# Altium PCB TAUV-Powerboard.PcbDoc (part 1 of 2)
Units mil, origin at the board's own origin, x right, y up, seen from the top; angles counter-clockwise.
Board outline 4160 x 2875 mil, 4 copper layers (Component Side, Ground Plane, Power Plane, Solder Side), stack 33.234 mil thick; 127 components, 71 nets, 369 pads, 185 vias.
Unrouted connection lines stored in the file: 125.
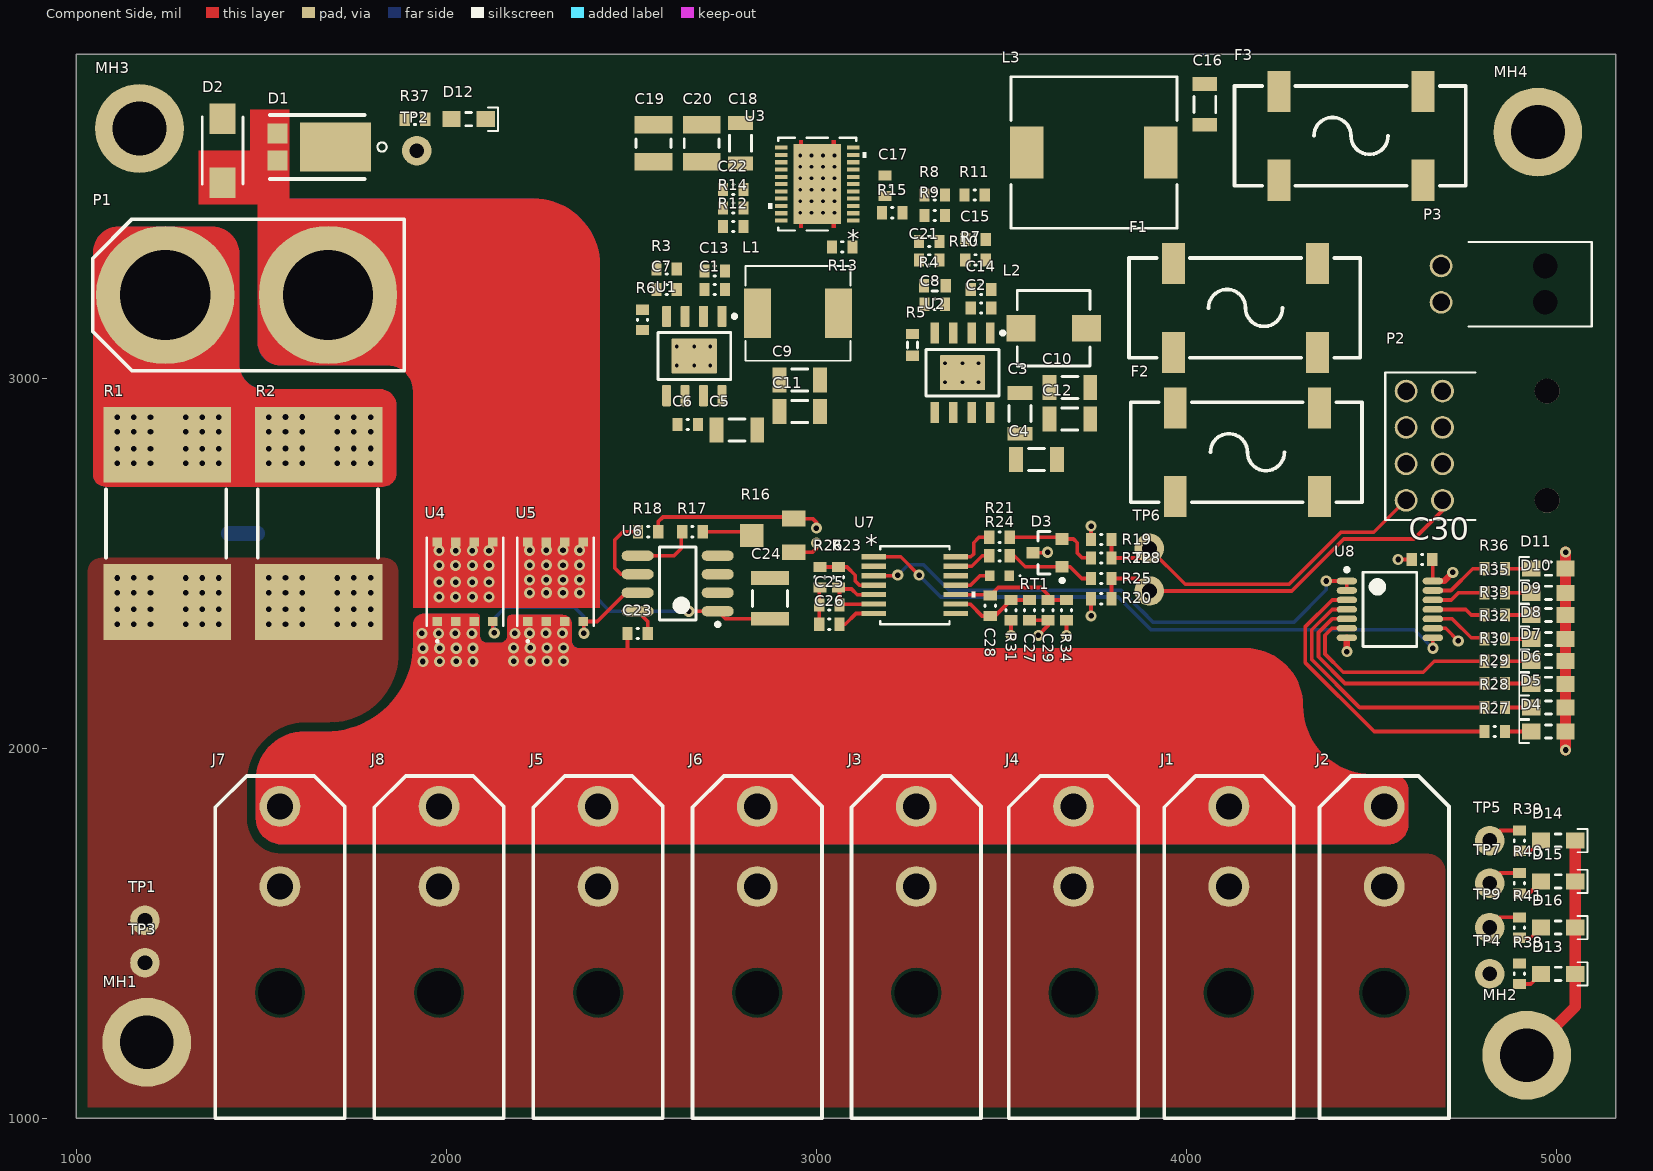
[diagram p0: Component Side view]
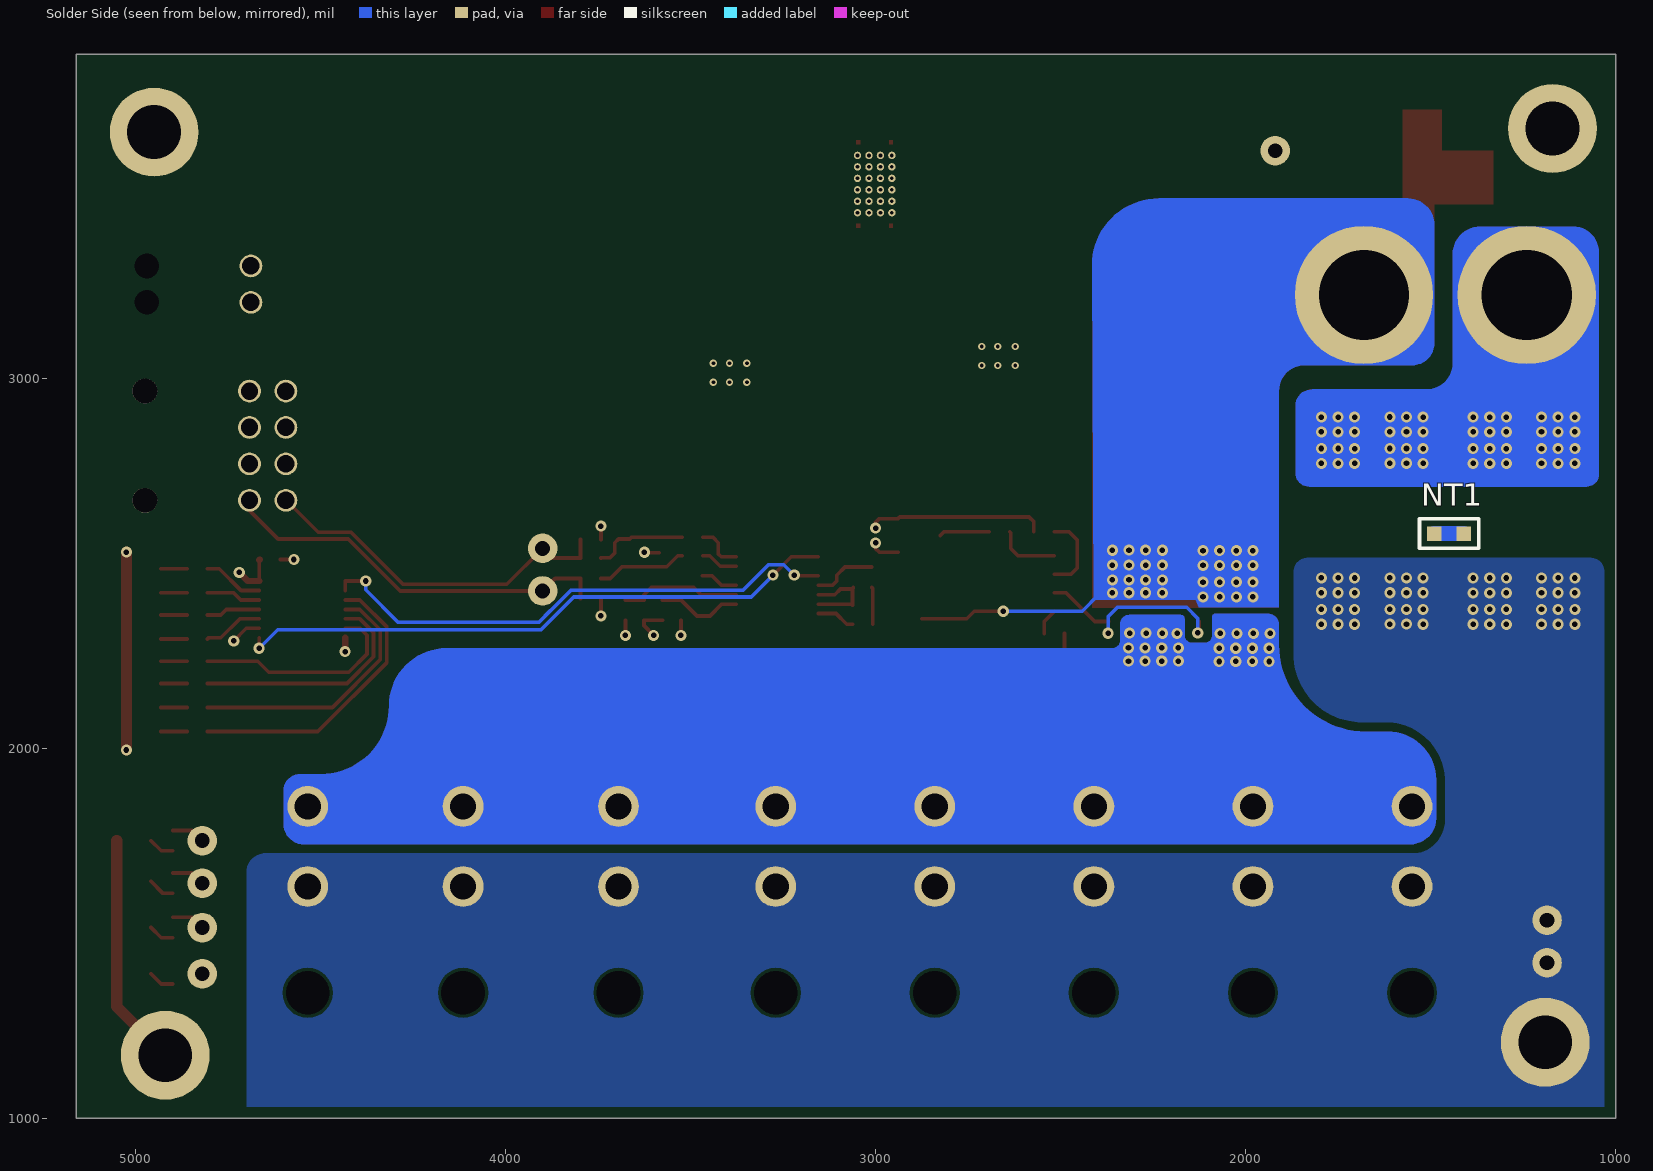
[diagram p1: Solder Side view, seen from below]
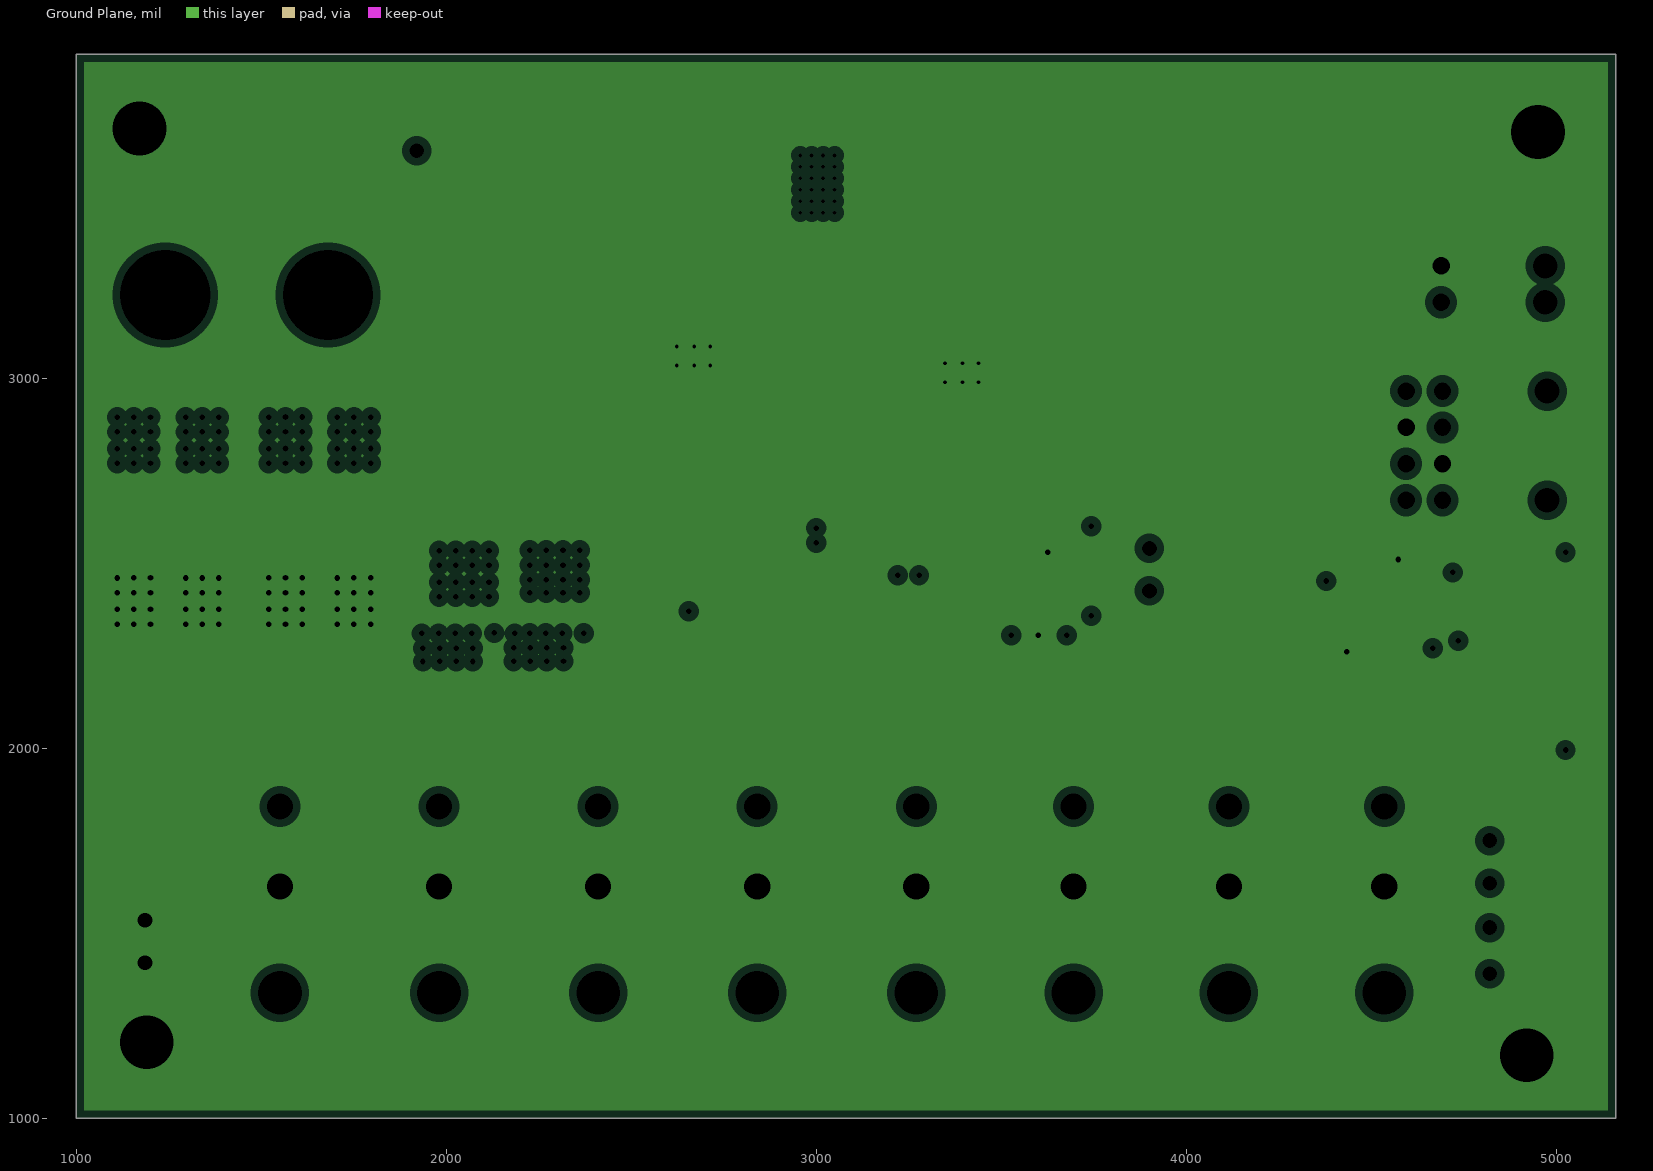
[diagram p2: Ground Plane, clearances drawn from the general rule]
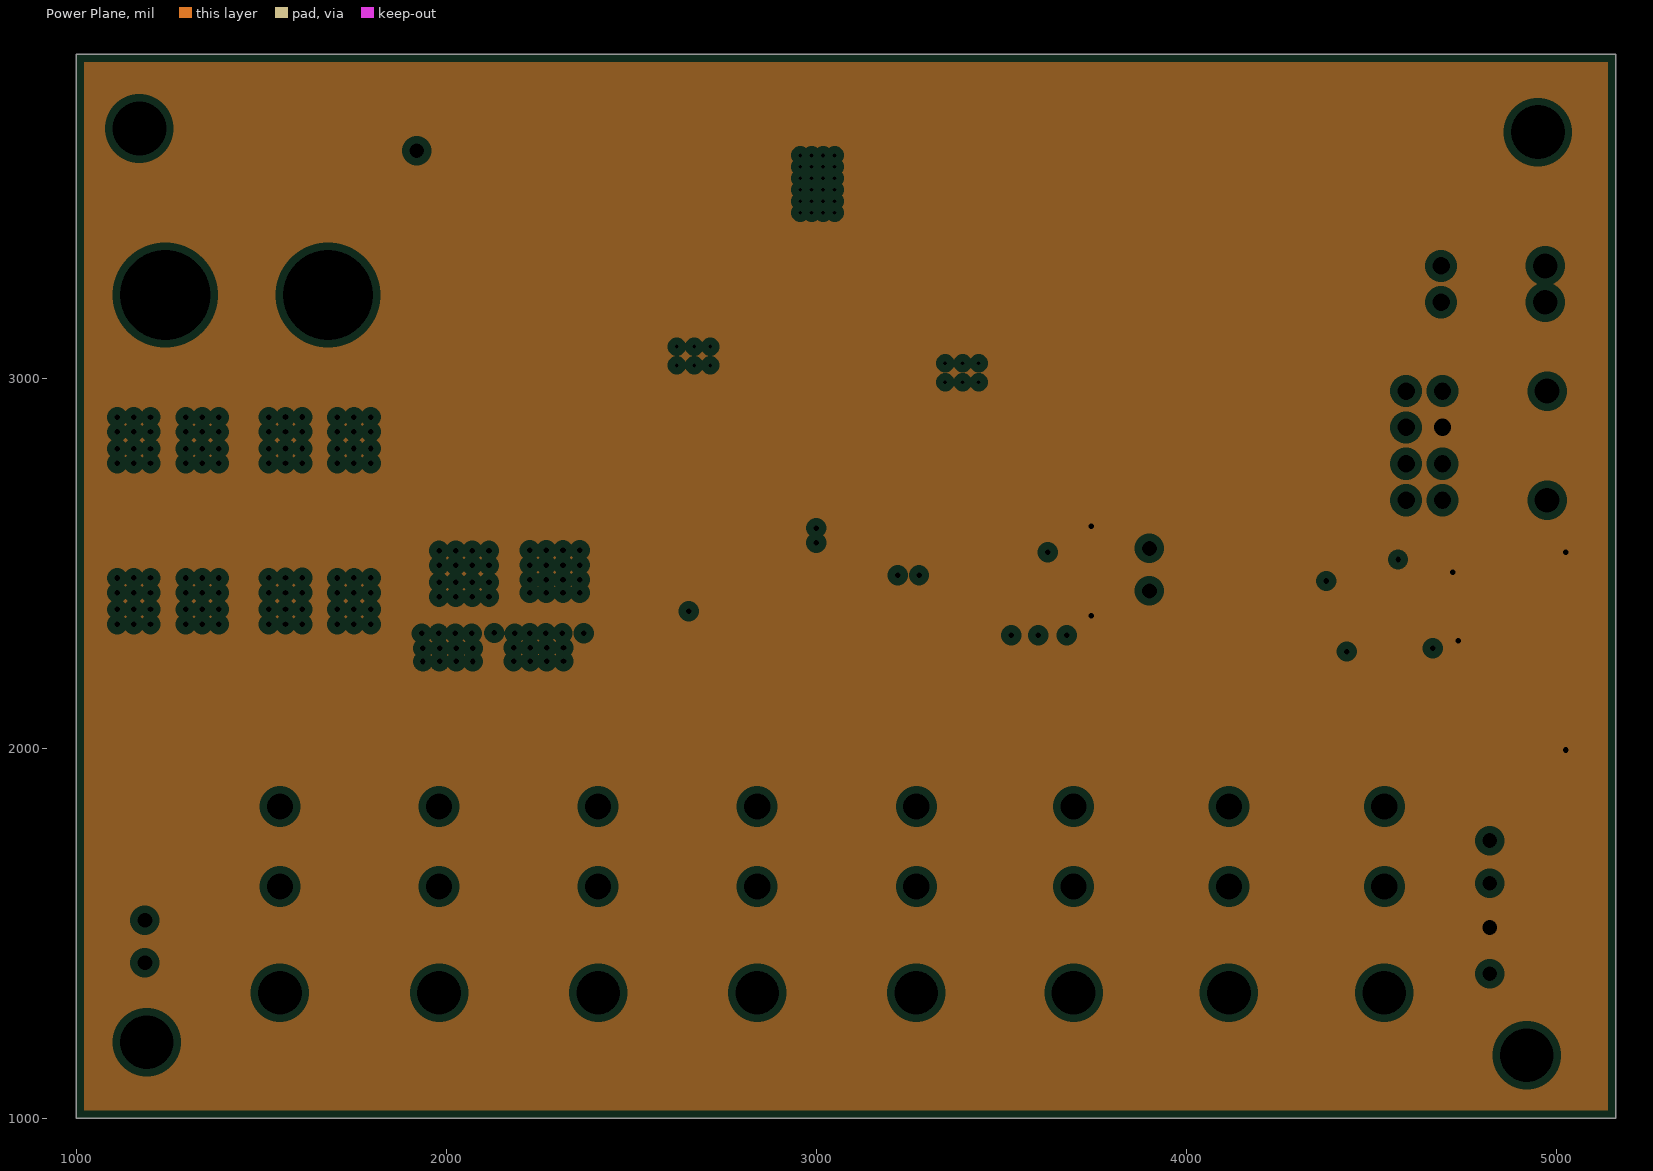
[diagram p3: Power Plane, clearances drawn from the general rule]

## Layer stack, top to bottom
Top Solder: solder mask 0.4, Solder Resist, Dk 3.5
Component Side: signal copper 1.4
Dielectric 1: core 12.6, FR-4, Dk 4.8
Ground Plane: plane copper 1.417, net GND
Dielectric 3: prepreg 5, Dk 4.2
Power Plane: plane copper 1.417, net VCC_3V3
Dielectric 4: core 10, Dk 4.2
Solder Side: signal copper 1.4
Bottom Solder: solder mask 0.4, Solder Resist, Dk 3.5

## Board outline
1000,1000 5160,1000 5160,3875 1000,3875

## Design rules (kind name [scope] priority, off if disabled: settings)
Clearance [All] p1: gap=8 ignorepadtopadclearanceinfootprint=FALSE except(7: SMDPad-SMDPad)
PlaneClearance [All] p1: clearance=20
PlaneConnect [All] p1: planeconnectstyle=Relief reliefexpansion=20 reliefentries=4 reliefconductorwidth=10 reliefairgap=10
PolygonConnect PolygonConnect_1 [InNet('GND')] p1: connectstyle=Direct reliefconductorwidth=50 reliefentries=4 polygonreliefangle="90 Angle" airgapwidth=10
PolygonConnect [All] p2: connectstyle=Relief reliefconductorwidth=10 reliefentries=4 polygonreliefangle="90 Angle" airgapwidth=10
RoutingVias [All] p1: holewidth=15 width=30 viastyle="Through Hole" minholewidth=15 minwidth=30 maxholewidth=28 maxwidth=50
SolderMaskExpansion [All] p1: expansion=4
Width [All] p1: maxlimit=30 minlimit=10 preferedwidth=10
28 further rules are at their usual default settings.

## Classes and differential pairs
component class U_Thrusters: *1 *2 *3 *4 *5 *6 *7 *8 C23 C24 J1 J2 J3 J4 J5 J6 J7 J8 R16 R17 R18 U4 U5 U6
component class U_Regulators: C1 C2 C3 C4 C5 C6 C7 C8 C9 C10 C11 C12 C13 C14 C15 C16 C17 C18 C19 C20 C21 C22 F1 F2 F3 L1 L2 L3 R3 R4 R5 R6 R7 R8 R9 R10 R11 R12 R13 R14 R15 U1 U2 U3
component class U_Power: D1 D2 NT1 P1 R1 R2
component class U_Interface: D12 D13 D14 D15 D16 MH1 MH2 MH3 MH4 P2 P3 R37 R38 R39 R40 R41 TP1 TP2 TP3 TP4 TP5 TP6 TP7 TP8 TP9
component class U_BMS: C25 C26 C27 C28 C29 C30 D3 D4 D5 D6 D7 D8 D9 D10 D11 R19 R20 R21 R22 R23 R24 R25 R26 R27 R28 R29 R30 R31 R32 R33 R34 R35 R36 RT1 U7 U8

## Components (designator, comment, footprint, x,y, rotation, side; value= is the part's Value field where it differs from the comment)
C1 "680nF" CAPC0603(1608)100_L 2725,3240 r180 top
C2 "100nF" CAPC0603(1608)100_L 3445,3190 r180 top
C3 "4.7uF" CAPC1206(3216)190_L 3550,2904.88 r270 top
C4 "4.7uF" CAPC1206(3216)190_L 3595,2780 r180 top
C5 "10uF" CAPC1206(3216)190_L 2785,2860 r180 top
C6 "100nF" CAPC0603(1608)100_L 2652.44,2875 r0 top
C7 "12pF" CAPC0603(1608)100_L 2595,3240 r180 top
C8 "75pF" CAPC0603(1608)100_L 3320,3200 r180 top
C9 "4.7uF" CAPC1206(3216)190_L 2955,2995 r0 top
C10 "4.7uF" CAPC1206(3216)190_L 3685,2975 r0 top
C11 "47uF" CAPC1206(3216)190_L 2955,2910 r0 top
C12 "47uF" CAPC1206(3216)190_L 3684.88,2890 r0 top
C13 "1uF" CAPC0603(1608)100_L 2725,3290 r180 top
C14 "1uF" CAPC0603(1608)100_L 3445,3240 r180 top
C15 "100nF" CAPC0603(1608)100_L 3430,3375 r0 top
C16 "100uF" CAPC1206(3216)190_L 4050,3740 r270 top
C17 "100nF" CAPC0603(1608)100_L 3185,3520 r270 top
C18 "4.7uF" CAPC1206(3216)190_L 2795,3635.12 r270 top
C19 "22uF" CAPC1210(3225)220_L 2560,3635 r270 top
C20 "22uF" CAPC1210(3225)220_L 2690,3635 r270 top
C21 "1nF" CAPC0603(1608)100_L 3305,3320 r0 top
C22 "1uF" CAPC0603(1608)100_L 2775,3510 r0 top
C23 "10nF" CAPC0603(1608)100_L 2516.73,2310 r180 top
C24 "22uF" CAPC1210(3225)100_L 2875,2405 r90 top
C25 "1uF 25V" CAPC0603(1608)100_L 3035,2386.97 r0 top value=1uF
C26 "1uF 25V" CAPC0603(1608)100_L 3035,2335 r0 top value=1uF
C27 "100nF 25V" CAPC0603(1608)100_L 3576.22,2373.03 r270 top value=100nF
C28 "100nF 25V" CAPC0603(1608)100_L 3470,2385 r270 top value=100nF
C29 "100nF 25V" CAPC0603(1608)100_L 3626.22,2373.03 r270 top value=100nF
C30 "100nF 25V" CAPC0603(1608)100_L 4637.02,2510 r0 top value=100nF
D1 "SBRT15U50SP5-13" SBRT15U50SP5-13 1700,3625 r270 top
D2 "SMAJ30CA" LFUS-DO-214AC-A-2_V 1395,3615 r90 top
D3 "MMBZ5V6ALT1G" ONSC-SOT-23-3-318-08_V 3625,2528 r180 top
D4 "LED RED" LED_0805 4978.74,2045 r0 top
D5 "LED RED" LED_0805 4978.74,2110 r0 top
D6 "LED YELLOW" LED_0805 4978.74,2174.02 r0 top
D7 "LED YELLOW" LED_0805 4978.74,2235 r0 top
D8 "LED YELLOW" LED_0805 4978.74,2295 r0 top
D9 "LED GREEN" LED_0805 4978.74,2360 r0 top
D10 "LED GREEN" LED_0805 4978.74,2420 r0 top
D11 "LED GREEN" LED_0805 4978.74,2485 r0 top
D12 "LED GREEN" LED_0805 2060,3700 r180 top
D13 "LED GREEN" LED_0805 5005,1390 r180 top
D14 "LED GREEN" LED_0805 5005,1750 r180 top
D15 "LED GREEN" LED_0805 5005,1640 r180 top
D16 "LED GREEN" LED_0805 5005,1515 r180 top
F1 "Fuse Holder 3588" "Fuse Holder 3588" 4160,3190 r0 top
F2 "Fuse Holder 3588" "Fuse Holder 3588" 4165,2800 r0 top
F3 "Fuse Holder 3588" "Fuse Holder 3588" 4445,3655 r0 top
J1 "2-pin megafit RA" "2-pin Megafit RA" 4115,1000 r0 top
J2 "2-pin megafit RA" "2-pin Megafit RA" 4535,1000 r0 top
J3 "2-pin megafit RA" "2-pin Megafit RA" 3270,1000 r0 top
J4 "2-pin megafit RA" "2-pin Megafit RA" 3695,1000 r0 top
J5 "2-pin megafit RA" "2-pin Megafit RA" 2410,1000 r0 top
J6 "2-pin megafit RA" "2-pin Megafit RA" 2840,1000 r0 top
J7 "2-pin megafit RA" "2-pin Megafit RA" 1550,1000 r0 top
J8 "2-pin megafit RA" "2-pin Megafit RA" 1980,1000 r0 top
L1 "SRP6540-100M" IND_SRP6540-100M 2950,3175 r0 top
L2 "6.8uH" "BOURNS SRP5030T" 3641.42,3135 r0 top
L3 "7443330220" WE-HCC-1090 3750,3610 r0 top
MH1 "#4-40" "Mounting Hole #4-40" 1190,1205 r0 top
MH2 "#4-40" "Mounting Hole #4-40" 4920,1170 r0 top
MH3 "#4-40" "Mounting Hole #4-40" 1170,3675 r0 top
MH4 "#4-40" "Mounting Hole #4-40" 4950,3665 r0 top
NT1 "Net Tie" Net_Tie_80mil 1410,2580 r0 bottom net-tie
P1 "XT90" XT90 1240,3225 r0 top
P2 "8-Pin 4x2 Molex Nano-Fit" "MOLEX NANO-FIT 2x4" 4593.9,2965.28 r270 top
P3 "2-Pos Molex Nano-Fit" "MOLEX NANO-FIT 1X2" 4688.5,3205 r90 top value=Value
R1 "WSLP59312 2mR 8W" WSLP59312L000FEA 1245,2820 r270 top
R2 "WSLP59312 2mR 8W" WSLP59312L000FEA 1655,2820 r270 top
R3 "200K 1%" RESC0603(1608)_L 2595,3295 r180 top value="200000.00 Ohm"
R4 "Res3" J1-0603 3320,3250 r180 top value=51K
R5 "Res3" J1-0603 3260,3090 r90 top value=22K1
R6 "22K1 1%" RESC0603(1608)_L 2530,3157.44 r90 top value="22100.00 Ohm"
R7 "1K65 1%" RESC0603(1608)_L 3430,3320 r180 top value="1650.00 Ohm"
R8 "560K" RESC0603(1608)_L 3320,3495 r180 top value="560000.00 Ohm"
R9 "976R" RESC0603(1608)_L 3320,3440 r180 top value="976.00 Ohm"
R10 "69K8" RESC0603(1608)_L 3305,3370 r0 top value="69800.00 Ohm"
R11 "86K6" RESC0603(1608)_L 3427.56,3495 r180 top value="86600.00 Ohm"
R12 "162K" RESC0603(1608)_L 2775,3410 r0 top value="162000.00 Ohm"
R13 "10K" RESC0603(1608)_L 3070,3355 r0 top value="10000.00 Ohm"
R14 "105K" RESC0603(1608)_L 2775,3460 r0 top value="105000.00 Ohm"
R15 "105K" RESC0603(1608)_L 3205,3447.18 r180 top value="105000.00 Ohm"
R16 "22AR100KLFTR" "TT BI 22A TRIM POT" 2939.17,2575 r90 top value=100k
R17 "1K 1% 0603(1608)" RESC0603(1608)_L 2665,2585 r0 top value="1000.00 Ohm"
R18 "330R 1% 0603(1608)" RESC0603(1608)_L 2545,2585 r0 top value="330.00 Ohm"
R19 "4K7" RESC0603(1608)_L 3770,2563.78 r180 top value="4700.00 Ohm"
R20 "4K7" RESC0603(1608)_L 3770,2403.78 r180 top value="4700.00 Ohm"
R21 "100R" RESC0603(1608)_L 3495,2570 r0 top value="100.00 Ohm"
R22 "100R" RESC0603(1608)_L 3770,2513.78 r0 top value="100.00 Ohm"
R23 "294K" RESC0603(1608)_L 3060,2461.97 r270 top value="294000.00 Ohm"
R24 "100R" RESC0603(1608)_L 3495,2520 r0 top value="100.00 Ohm"
R25 "100R" RESC0603(1608)_L 3770,2458.78 r0 top value="100.00 Ohm"
R26 "16K5" RESC0603(1608)_L 3010,2461.97 r90 top value="16500.00 Ohm"
R27 "100R" RESC0603(1608)_L 4833.74,2045 r0 top value="100.00 Ohm"
R28 "100R" RESC0603(1608)_L 4833.74,2110 r0 top value="100.00 Ohm"
R29 "100R" RESC0603(1608)_L 4833.74,2175 r0 top value="100.00 Ohm"
R30 "100R" RESC0603(1608)_L 4833.74,2235 r0 top value="100.00 Ohm"
R31 "100R 1%" RESC0603(1608)_L 3526.22,2373.03 r90 top value="100.00 Ohm"
R32 "100R" RESC0603(1608)_L 4833.74,2295 r0 top value="100.00 Ohm"
R33 "100R" RESC0603(1608)_L 4833.74,2360 r0 top value="100.00 Ohm"
R34 "100R 1%" RESC0603(1608)_L 3676.22,2373.03 r90 top value="100.00 Ohm"
R35 "100R" RESC0603(1608)_L 4833.74,2420 r0 top value="100.00 Ohm"
R36 "100R" RESC0603(1608)_L 4833.74,2485 r0 top value="100.00 Ohm"
R37 "1K2" RESC0603(1608)_L 1915,3700 r180 top value="1200.00 Ohm"
R38 "1K2" RESC0603(1608)_L 4900,1390 r90 top value="1200.00 Ohm"
R39 "470R" RESC0603(1608)_L 4900,1750 r90 top value="470.00 Ohm"
R40 "220R" RESC0603(1608)_L 4900,1635 r90 top value="220.00 Ohm"
R41 "100R" RESC0603(1608)_L 4900,1515 r90 top value="100.00 Ohm"
RT1 "NCP18XH103F03RB" MURA-NCP18XH103F03RB-2_V 3495,2466.09 r180 top
TP1 "Test Point Loop" "Test Point Loop - Black" 1185,1535 r90 top
TP2 "Test Point Loop" "Test Point Loop - Black" 1920,3615 r0 top
TP3 "Test Point Loop" "Test Point Loop - Black" 1185,1420 r90 top
TP4 "Test Point Loop" "Test Point Loop - Black" 4820,1390 r0 top
TP5 "Test Point Loop" "Test Point Loop - Black" 4820,1750 r0 top
TP6 "Test Point Loop" "Test Point Loop - Black" 3900,2540 r0 top
TP7 "Test Point Loop" "Test Point Loop - Black" 4820,1635 r0 top
TP8 "Test Point Loop" "Test Point Loop - Black" 3900,2425 r0 top
TP9 "Test Point Loop" "Test Point Loop - Black" 4820,1515 r0 top
U1 "LMR23630-Q1" DDA0008E_N 2670,3060 r270 top
U2 "LMR23630-Q1" DDA0008E_N 3395,3015 r270 top
U3 "Part Number: TPS53319DQPT" DQP22_3P24X5P547 3002.44,3524.68 r180 top value=Value
U4 "Part Number: CSD18563Q5A" DQJ8 2050,2450 r90 top value=Value
U5 "Part Number: CSD18563Q5A" DQJ8 2295,2450 r90 top value=Value
U6 "MIC5021YM" MICL-SOICN-8LD-PL-1_V 2625,2445 r180 top
U7 "BQ34Z100PWR-G1" PW14 3266,2440.5 r0 top value=Value
U8 "SN74HC164PW" PW0014A_N 4550,2375 r0 top

## Footprints (in the part's own frame and the unit in brackets; to place one, negate y for a bottom-side part, rotate by r counter-clockwise, add the part's x,y. Pads: shape width x height; smd on the part's side, far side on the other; paste and mask are expansions set on the pad)
"2-pin Megafit RA" [mm]
  round 2.8 hole 1.8: 1(0,15.9) 2(0,21.4)
  round 0 hole 3 unplated: ""(0,8.6)
  silkscreen extent -4.44,0 4.44,23.49, body extent -4.16,-24.98 4.19,21.9, height 16.75
"BOURNS SRP5030T" [mm] "Precision Wire Wound Inductor, 2-Leads, Body 5.70x5.20mm, IPC Medium Density"
  rect 2x1.8 smd: 1(-2.25,0) 2(2.25,0)
  silkscreen extent -2.5,-2.6 2.5,2.6, body extent -2.85,-2.6 2.85,2.6, height 3
CAPC0603(1608)100_L [mm] "Chip Capacitor, Body 1.6x0.8mm, Height 1.0mm, IPC High Density"
  rect 0.7x0.9 smd: 1(-0.7,0) 2(0.7,0)
  silkscreen extent -0.05,-0.35 0.05,0.35, body extent -0.87,-0.47 0.88,0.48, height 1
CAPC1206(3216)190_L [mm] "Chip Capacitor, Body 3.2x1.6mm, Height 1.9mm, IPC High Density"
  rect 0.95x1.7 smd: 1(-1.4,0) 2(1.4,0)
  silkscreen extent -0.55,-0.75 0.55,0.75, body extent -1.7,-0.9 1.7,0.9, height 1.9
CAPC1210(3225)100_L [mm] "Chip Capacitor, Body 3.2x2.5mm, Height 1mm, IPC High Density"
  rect 0.95x2.6 smd: 1(-1.4,0) 2(1.4,0)
  silkscreen extent -0.55,-1.2 0.55,1.2, body extent -1.7,-1.35 1.7,1.35, height 1
CAPC1210(3225)220_L [mm] "Chip Capacitor, Body 3.2x2.5mm, Height 2.2mm, IPC High Density"
  rect 1.2x2.6 smd: 1(-1.275,0) 2(1.275,0)
  silkscreen extent -0.3,-1.2 0.3,1.2, body extent -1.7,-1.35 1.7,1.35, height 2.2
DDA0008E_N [mm] "SOP, 8-Leads, Body 4x5mm, Pitch 1.27mm, Thermal Pad 2.4x3.1mm, IPC Medium Density"
  rrect17% 1.45x0.6 smd: 1(-2.725,1.905) 2(-2.725,0.635) 3(-2.725,-0.635) 4(-2.725,-1.905) 5(2.725,-1.905) 6(2.725,-0.635) 7(2.725,0.635) 8(2.725,1.905)
  rrect4% 2.4x3.1 smd: 9(0,0)
  silkscreen extent -2.85,-2.5 1.6,2.88, body extent -2.98,-2.45 2.98,2.45, height 1.5
DQJ8 [mm]
  rect 0.63x0.65 smd paste-0.1: 1(-2.735,1.905) 2(-2.735,0.635) 3(-2.735,-0.635) 4(-2.735,-1.905) 5(2.735,-1.905) 6(2.735,-0.635) 7(2.735,0.635) 8(2.735,1.905)
  Component Side region: 2.745,0 2.745,2.23 -1.545,2.23 -1.545,0
  Component Side region: 2.745,0 2.745,-2.23 -1.545,-2.23 -1.545,0
  silkscreen extent -4.17,-2.63 3.03,2.63, body extent -2.9,-2.5 2.9,2.5, height 2.06
DQP22_3P24X5P547 [mil]
  rect 33.46x11.02 smd paste-16.73: 1(-97.44,98.43) 2(-97.44,78.74) 3(-97.44,59.06) 4(-97.44,39.37) 5(-97.44,19.68) 6(-97.44,0) 7(-97.44,-19.68) 8(-97.44,-39.37) 9(-97.44,-59.06) 10(-97.44,-78.74) 11(-97.44,-98.43) 12(97.44,-98.43) 13(97.44,-78.74) 14(97.44,-59.06) 15(97.44,-39.37) 16(97.44,-19.68) 17(97.44,0) 18(97.44,19.68) 19(97.44,39.37) 20(97.44,59.06) 21(97.44,78.74) 22(97.44,98.43)
  rect 127.56x215.71 smd paste-107.85 mask-107.5: 23(0,0)
  round 20 hole 10: V(-46.5,46.5) V(-46.5,77.5) V(-46.5,-15.5) V(-46.5,15.5) V(-46.5,-77.5) V(-46.5,-46.5) V(-15.5,77.5) V(-15.5,46.5) V(-15.5,15.5) V(-15.5,-15.5) V(-15.5,-46.5) V(-15.5,-77.5) V(15.5,77.5) V(15.5,46.5) V(15.5,15.5) V(15.5,-15.5) V(15.5,-46.5) V(15.5,-77.5) V(46.5,46.5) V(46.5,77.5) V(46.5,-15.5) V(46.5,15.5) V(46.5,-77.5) V(46.5,-46.5)
  Component Side region: 49.21,-107.85 39.37,-107.85 39.37,-118.09 49.21,-118.09
  Component Side region: -49.21,-107.85 -39.37,-107.85 -39.37,-118.09 -49.21,-118.09
  Component Side region: -49.21,107.85 -39.37,107.85 -39.37,118.09 -49.21,118.09
  Component Side region: 49.21,107.85 39.37,107.85 39.37,118.09 49.21,118.09
  Component Side region: 0,-107.85 0,-107.85 0,-107.85 0,-107.85 0,-107.85 0,-107.85 0,-107.85 0,-107.85
  Component Side region: 0,107.85 0,107.85 0,107.85 0,107.85 0,107.85 0,107.85 0,107.85 0,107.85
  silkscreen extent -132,-125 132,125, body extent -100,-120 200,120, height 81
"Fuse Holder 3588" [mil] "Keystone Electronics 3588 Automotive Blade Fuse Holder, SMT"
  rect 62x111 smd: 1(-195,-120) 1(-195,120) 2(195,-120) 2(195,120)
  silkscreen extent -315,-135 310,135, body extent -316,-173 314,172, height 686
IND_SRP6540-100M [mm]
  rect 1.85x3.4 smd: 1(-2.775,0) 2(2.775,0)
  silkscreen extent -3.6,-3.25 3.6,3.25, body extent -3.59,-3.25 3.59,3.25, height 3.97
J1-0603 [mm] "Chip Resistor, Body 1.6x0.8mm, IPC High Density"
  rect 0.7x0.9 smd: 1(-0.75,0) 2(0.75,0)
  silkscreen extent -0.2,-0.35 0.2,0.35, body extent -0.85,-0.48 0.85,0.48, height 0.9
LED_0805 [mm] "Liteon 0805 Chip LED"
  rect 1.25x1.1 smd: 1(-1.175,0) 2(1.175,0)
  silkscreen extent -2.01,-0.8 0.2,0.8, body extent -1,-0.63 1,0.63, height 0.8
LFUS-DO-214AC-A-2_V [mm] "Molded Diode, 2-Leads, Body 4.6x2.79mm"
  rect 2.1x1.8 smd: 1(-2.2,0) 2(2.2,0)
  silkscreen extent -2.3,-1.4 2.3,1.4, body extent -2.52,-1.4 2.52,1.4, height 2.29
MICL-SOICN-8LD-PL-1_V [mm] "SOIC, 8-Leads, Body 5x4mm, Pitch 1.27mm"
  oval 2.2x0.7 smd: 1(-2.75,1.905) 2(-2.75,0.635) 3(-2.75,-0.635) 4(-2.75,-1.905) 5(2.75,-1.905) 6(2.75,-0.635) 7(2.75,0.635) 8(2.75,1.905)
  silkscreen extent -2.88,-2.5 1.25,2.93, body extent -3.01,-2.44 3.01,2.45, height 1.73
"MOLEX NANO-FIT 1X2" [mm]
  round 1.56 hole 1.2: 1(0,0) 2(2.5,0)
  round 0 hole 1.7 unplated: ""(0,-7.15) ""(2.5,-7.15)
  silkscreen extent -1.65,-10.35 4.15,-1.9, body extent -2.67,-25.85 5.03,0.33, height 7.46
"MOLEX NANO-FIT 2x4" [mm] "MOLEX NANO-FIT 2X4"
  round 1.56 hole 1.2: 1(0,0) 2(2.5,0) 3(5,0) 4(7.5,0) 5(0,2.5) 6(2.5,2.5) 7(5,2.5) 8(7.5,2.5)
  round 1.7 hole 1.7: ""(0,9.68) ""(7.5,9.68)
  silkscreen extent -1.28,-1.43 8.85,4.77, body extent -2.6,-0.44 10.1,29.85, height 10.71
"Mounting Hole #4-40" [mm] "Mounting Hole for ANSI #4-40 w/ Flat Washer, Loose Fit"
  round 6.1 hole 3.7: 0(0,0)
MURA-NCP18XH103F03RB-2_V [mm] "Chip, 2-Leads, Body 1.6x0.8mm"
  rect 0.65x0.7 smd: 1(-0.675,0) 2(0.675,0)
  silkscreen extent -1.45,-0.05 -1.35,0.05, body extent -0.8,-0.4 0.8,0.4, height 0.8
Net_Tie_80mil [mm]
  rect 1x1 smd: 1(0,0) 2(2.032,0)
  Component Side lines w1.016: 0,0 2.032,0
  silkscreen extent -1.02,-1.02 3.05,1.02
ONSC-SOT-23-3-318-08_V [mm] "SOT23, 3-Leads, Body 2.92x1.3mm, Pitch 0.95mm"
  rect 0.9x0.8 smd: 1(-1,0.95) 2(-1,-0.95) 3(1,0)
  silkscreen extent -1.13,-1.46 0.65,2.02, body extent -0.65,-1.46 0.65,1.46, height 1.11
PW14 [mil]
  rect 66x14 smd paste+0 mask+0: 1(-111,76.77) 2(-111,51.18) 3(-111,25.59) 4(-111,0) 5(-111,-25.59) 6(-111,-51.18) 7(-111,-76.77) 8(111,-76.77) 9(111,-51.18) 10(111,-25.59) 11(111,0) 12(111,25.59) 13(111,51.18) 14(111,76.77)
  silkscreen extent -94,-106 164,106, body extent -130,-101 130,101, height 47
PW0014A_N [mm] "SOP, 14-Leads, Body 5.1x4.5mm, Pitch 0.65mm, IPC Medium Density"
  oval 1.4x0.45 smd: 1(-2.95,1.95) 2(-2.95,1.3) 3(-2.95,0.65) 4(-2.95,0) 5(-2.95,-0.65) 6(-2.95,-1.3) 7(-2.95,-1.95) 8(2.95,-1.95) 9(2.95,-1.3) 10(2.95,-0.65) 11(2.95,0) 12(2.95,0.65) 13(2.95,1.3) 14(2.95,1.95)
  silkscreen extent -3.07,-2.55 1.85,2.85, body extent -3.21,-2.5 3.21,2.5, height 1
RESC0603(1608)_L [mm] "Chip Resistor, Body 1.6x0.8mm, IPC High Density"
  rect 0.7x0.9 smd: 1(-0.7,0) 2(0.7,0)
  silkscreen extent -0.05,-0.35 0.05,0.35, body extent -0.85,-0.47 0.85,0.47, height 0.6
SBRT15U50SP5-13 [mm]
  rect 1.39x1.4 smd: 1(-0.92,-3.982) 1(0.92,-3.982)
  rect 3.36x4.86 smd: 2(0,0)
  silkscreen extent -2.2,-4.5 2.2,3.52, body extent -2,-4.6 2,2.4, height 1.05
"Test Point Loop - Black" [mil] ", black"
  round 80 hole 40: 1(0,0)
  body extent -50,-50 50,50, height 180
"TT BI 22A TRIM POT" [mm] "Model 22A (22AR100KLFTR)"
  rect 1.09x1.6 smd: 1(1.155,0) 3(-1.155,0)
  rect 1.6x1.6 smd: 2(0,2.9)
  body extent -1.6,-0.38 1.6,3.13, height 2.22
WE-HCC-1090 [mm] "Inductor, 2-Leads, Body 10.9 x 10.0 mm"
  rect 2.3x3.6 smd: 1(-4.6,0) 2(4.6,0)
  silkscreen extent -5.7,-5.2 5.7,5.2, body extent -5.13,-5 5.13,5, height 9.29
WSLP59312L000FEA [mm] "0.002R 8W Shunt"
  rect 5.2x8.75 smd: 1(0,0) 2(10.8,0)
  silkscreen extent 3.05,-4.19 7.75,4.06, body extent -2.17,-3.94 12.83,3.81, height 0.89
XT90 [mm]
  round 9.5 hole 6.2 unplated: 1(0,0) 2(11.176,0)
  silkscreen extent -4.99,-5.21 16.41,5.21, body extent -4.99,-5.5 16.41,5.5, height 20.7

## Part data
C1: library part CMP-1035-02724-1, "CAP 680nF 50V ±10% 0603 (1608 Metric) Thickness 1mm SMD", Case-EIA=0603, Case-Metric=1608, Rated Voltage="50 V", Tolerance=±10%, Max Thickness="1 mm", Technology=SMT
C2: library part CMP-1035-02595-1, "CAP 100nF 100V ±10% 0603 (1608 Metric) Thickness 1mm SMD", Case-EIA=0603, Case-Metric=1608, Rated Voltage="100 V", Tolerance=±10%, Max Thickness="1 mm", Technology=SMT
C3 C4 C9 C10 C18: library part CMP-1037-04922-1, "CAP 4.7uF 35V ±10% 1206 (3216 Metric) Thickness 1.9mm SMD", Case-EIA=1206, Case-Metric=3216, Rated Voltage="35 V", Tolerance=±10%, Max Thickness="1.9 mm", Technology=SMT
  C9 C10: Supplier 1=Digi-Key
C5: library part CMP-1037-04982-1, "CAP 10uF 50V ±10% 1206 (3216 Metric) Thickness 1.9mm SMD", Case-EIA=1206, Case-Metric=3216, Rated Voltage="50 V", Tolerance=±10%, Max Thickness="1.9 mm", Technology=SMT
C6 C15 C17: library part CMP-1035-02580-1, "CAP 100nF 10V ±10% 0603 (1608 Metric) Thickness 1mm SMD", Case-EIA=0603, Case-Metric=1608, Rated Voltage="10 V", Tolerance=±10%, Max Thickness="1 mm", Technology=SMT
C7: library part CMP-1035-00615-1, "CAP 12pF 50V ±0.25pF 0603 (1608 Metric) Thickness 1mm SMD", Case-EIA=0603, Case-Metric=1608, Rated Voltage="50 V", Tolerance=±0.25pF, Max Thickness="1 mm", Technology=SMT
C8: library part CMP-1035-01189-1, "CAP 75pF 25V ±1% 0603 (1608 Metric) Thickness 1mm SMD", Case-EIA=0603, Case-Metric=1608, Rated Voltage="25 V", Tolerance=±1%, Max Thickness="1 mm", Technology=SMT
C11 C12: library part CMP-1037-05003-1, "CAP 47uF 16V ±20% 1206 (3216 Metric) Thickness 1.9mm SMD", Case-EIA=1206, Case-Metric=3216, Rated Voltage="16 V", Tolerance=±20%, Max Thickness="1.9 mm", Technology=SMT
C13 C14: library part CMP-1035-02743-1, "CAP 1uF 35V ±10% 0603 (1608 Metric) Thickness 1mm SMD", Case-EIA=0603, Case-Metric=1608, Rated Voltage="35 V", Tolerance=±10%, Max Thickness="1 mm", Technology=SMT
C16: library part CMP-1037-05006-1, "CAP 100uF 10V ±20% 1206 (3216 Metric) Thickness 1.9mm SMD", Case-EIA=1206, Case-Metric=3216, Rated Voltage="10 V", Tolerance=±20%, Max Thickness="1.9 mm", Technology=SMT
C19 C20: library part CMP-1038-02286-1, "CAP 22uF 25V -20% to +80% 1210 (3225 Metric) Thickness 2.2mm SMD", Case-EIA=1210, Case-Metric=3225, Rated Voltage="25 V", Tolerance="-20% to +80%", Max Thickness="2.2 mm", Technology=SMT
C21: library part CMP-1035-01885-1, "CAP 1nF 25V ±20% 0603 (1608 Metric) Thickness 1mm SMD", Case-EIA=0603, Case-Metric=1608, Rated Voltage="25 V", Tolerance=±20%, Max Thickness="1 mm", Technology=SMT
C22: library part CMP-1035-02745-1, "CAP 1uF 50V ±10% 0603 (1608 Metric) Thickness 1mm SMD", Case-EIA=0603, Case-Metric=1608, Rated Voltage="50 V", Tolerance=±10%, Max Thickness="1 mm", Technology=SMT
C23: library part CMP-1035-02315-1, "CAP 10nF 25V ±2% 0603 (1608 Metric) Thickness 1mm SMD", Case-EIA=0603, Case-Metric=1608, Rated Voltage="25 V", Tolerance=±2%, Max Thickness="1 mm", Technology=SMT
C24: library part CMP-1038-01290-1, "CAP 22nF 16V ±5% 1210 (3225 Metric) Thickness 1mm SMD", Case-EIA=1210, Case-Metric=3225, Rated Voltage="16 V", Tolerance=±20%, Max Thickness="1 mm", Technology=SMT
C25 C26: library part CMP-1035-02740-1, "CAP 1uF 25V ±10% 0603 (1608 Metric) Thickness 1mm SMD", Case-EIA=0603, Case-Metric=1608, Rated Voltage="25 V", Tolerance=±10%, Max Thickness="1 mm", Technology=SMT
C27 C28 C29 C30: library part CMP-1035-02588-1, "CAP 100nF 25V ±10% 0603 (1608 Metric) Thickness 1mm SMD", Case-EIA=0603, Case-Metric=1608, Rated Voltage="25 V", Tolerance=±10%, Max Thickness="1 mm", Technology=SMT
D1: Capacitance @ Vr, F=-, Current - Average Rectified (Io)=15A, Manufacturer="Diodes Incorporated", Operating Temperature - Junction="-65°C ~ 150°C", Package / Case="PowerDI™ 5", Supplier Device Package=PowerDI®5, Supplier Part Number 1=SBRT15U50SP5-13DICT-ND, Category="Discrete Semiconductor Products", ComponentLink1Description=https://media.digikey.com/pdf/Data%20Sheets/Diodes%20PDFs/SBRT15U50SP5.pdf, ComponentLink1URL=https://media.digikey.com/pdf/Data%20Sheets/Diodes%20PDFs/SBRT15U50SP5.pdf, Diode Type="Super Barrier", Manufacturer Part Number=SBRT15U50SP5-13, Mounting Type="Surface Mount", Packaging="Cut Tape (CT)", Part Status=Active, Pricing 1="1=0.93, 10=0.823, 100=0.6306, 500=0.49852, 1000=0.39882 (USD)", RoHS="RoHS Compliant", Speed="Fast Recovery =< 500ns, > 200mA (Io)", Stock 1=12134, Supplier 1=Digi-Key
D2: library part CMP-2000-07088-1, "Transient Voltage Suppression Diode, 30 V, -65 to 150 degC, 2-Pin SMD, RoHS, Tape and Reel", Capacitance @ Frequency=-, Current - Peak Pulse (10/1000µs)=8.3A, Manufacturer=Littelfuse-Inc., Operating Temperature=-55°C~150°C(TJ), Package / Case=DO-214AC,SMA, Package Description="2-Pin Surface Mount Device, Body 4.295 x 2.595 mm", Package Reference=DO-214AC, Power - Peak Pulse=400W, Power Line Protection=No, Supplier Device Package=DO-214AC(SMA), Voltage - Breakdown (Min)=33.3V, Voltage - Clamping (Max) @ Ipp=48.4V, Voltage - Reverse Standoff (Typ)=30V, Applications=GeneralPurpose, Bidirectional Channels=1, Category=CircuitProtection, Datasheet URL=http://www.littelfuse.com/~/media/electronics/datasheets/tvs_diodes/littelfuse_tvs_diode_smaj_datasheet.pdf.pdf, Datasheet Version=11/2015, Family=TVS-Diodes, Manufacturer URL=http://www.littelfuse.com/, Mounting Technology=SurfaceMount, Mounting Type=SurfaceMount, Packaging=Digi-Reel®, Series=SMAJ, Type=Zener, Unidirectional Channels=-
D3: library part CMP-1060-01222-1, "24 W Peak Power Zener Transient Voltage Suppressor, Dual Common Anode Zeners for ESD Protection, 3-Pin SOT-23, Pb-Free, Tape and Reel", Manufacturer="On Semiconductor", ComponentLink1Description="Manufacturer URL", ComponentLink1URL=http://www.onsemi.com/, ComponentLink2Description=Datasheet, ComponentLink2URL=http://www.onsemi.cn/pub_link/Collateral/MMBZ5V6ALT1-D.PDF, ComponentLink3Description="Package Specification", ComponentLink3URL=http://www.onsemi.cn/pub_link/Collateral/318-08.PDF, DatasheetVersion="Rev. 13", Mounting Technology="Surface Mount", PackageDescription="3-Pin Small Outline Transistor, Body 2.92 x 1.3 mm, Pitch 0.95 mm", PackageReference=SOT-23-3-318-08, PackageVersion="Rev. AP, 11/2009", Packing="Tape and Reel", PartNumber=MMBZ5V6ALT1G, RoHS=Pb-Free, VZ Typ (V)=5.6
D4 D5: library part LED0, "led /  LTST-C171KRKT", Color=Red, Current - Test=20mA, Lens Color=Colorless, Manufacturer="Lite-On Inc.", Manufacturer Part Number=LTST-C171KRKT, Millicandela Rating=54mcd, Package / Case="0805 (2012 Metric)", Supplier Part Number 1=160-1427-1-ND, Voltage - Forward (Vf) (Typ)=2V, Category=Optoelectronics, ComponentLink1Description=http://optoelectronics.liteon.com/upload/download/DS22-2000-109/LTST-C171KRKT.pdf, ComponentLink1URL=http://optoelectronics.liteon.com/upload/download/DS22-2000-109/LTST-C171KRKT.pdf, Features=-, Height (Max)=0.80mm, Lens Style/Size="Rectangle with Flat Top, 1.40mm x 1.25mm", Lens Transparency=Clear, Mounting Type="Surface Mount", Packaging="Cut Tape (CT)", Part Status=Active, Pricing 1="1=0.31, 10=0.225, 25=0.1656, 100=0.1183, 250=0.0804, 500=0.07096, 1000=0.05558 (USD)", RoHS="RoHS Compliant", Size / Dimension="2.00mm L x 1.25mm W", Stock 1=260544, Supplier 1=Digi-Key, Viewing Angle=130°, Wavelength - Dominant=631nm, Wavelength - Peak=639nm
D6 D7 D8: library part LED0, "led /  LTST-C171KSKT", Color=Green, Current - Test=20mA, Lens Color=Colorless, Manufacturer="Lite-On Inc.", Manufacturer Part Number=LTST-C171KGKT, Millicandela Rating=35mcd, Package / Case="0805 (2012 Metric)", Supplier Part Number 1=160-1426-1-ND, Voltage - Forward (Vf) (Typ)=2V, Category=Optoelectronics, ComponentLink1Description=http://optoelectronics.liteon.com/upload/download/DS22-2000-110/LTST-C171KSKT.pdf, ComponentLink1URL=http://optoelectronics.liteon.com/upload/download/DS22-2000-110/LTST-C171KSKT.pdf, Features=-, Height (Max)=0.90mm, Lens Style/Size="Rectangle with Flat Top, 1.40mm x 1.25mm", Lens Transparency=Clear, Mounting Type="Surface Mount", Packaging="Cut Tape (CT)", Part Status=Active, Pricing 1="1=0.31, 10=0.225, 25=0.1656, 100=0.1183, 250=0.0804, 500=0.07096, 1000=0.05558 (USD)", RoHS="RoHS Compliant", Size / Dimension="2.00mm L x 1.25mm W", Stock 1=350441, Supplier 1=Digi-Key, Viewing Angle=130°, Wavelength - Dominant=571nm, Wavelength - Peak=574nm
D9 D10 D11: library part LED0, "led /  LTST-C171KRKT", Color=Green, Current - Test=20mA, Lens Color=Colorless, Manufacturer="Lite-On Inc.", Manufacturer Part Number=LTST-C171KGKT, Millicandela Rating=35mcd, Package / Case="0805 (2012 Metric)", Supplier Part Number 1=160-1426-1-ND, Voltage - Forward (Vf) (Typ)=2V, Category=Optoelectronics, ComponentLink1Description=http://optoelectronics.liteon.com/upload/download/DS22-2000-118/LTST-C171KGKT.pdf, ComponentLink1URL=http://optoelectronics.liteon.com/upload/download/DS22-2000-118/LTST-C171KGKT.pdf, Features=-, Height (Max)=0.90mm, Lens Style/Size="Rectangle with Flat Top, 1.40mm x 1.25mm", Lens Transparency=Clear, Mounting Type="Surface Mount", Packaging="Cut Tape (CT)", Part Status=Active, Pricing 1="1=0.31, 10=0.225, 25=0.1656, 100=0.1183, 250=0.0804, 500=0.07096, 1000=0.05558 (USD)", RoHS="RoHS Compliant", Size / Dimension="2.00mm L x 1.25mm W", Stock 1=350441, Supplier 1=Digi-Key, Viewing Angle=130°, Wavelength - Dominant=571nm, Wavelength - Peak=574nm
D12 D13 D14 D15 D16: library part LED0, "led", Color=Green, Current - Test=20mA, Lens Color=Colorless, Manufacturer="Lite-On Inc.", Manufacturer Part Number=LTST-C171KGKT, Millicandela Rating=35mcd, Package / Case="0805 (2012 Metric)", Supplier Part Number 1=160-1426-1-ND, Voltage - Forward (Vf) (Typ)=2V, Category=Optoelectronics, ComponentLink1Description=http://optoelectronics.liteon.com/upload/download/DS22-2000-118/LTST-C171KGKT.pdf, ComponentLink1URL=http://optoelectronics.liteon.com/upload/download/DS22-2000-118/LTST-C171KGKT.pdf, Features=-, Height (Max)=0.90mm, Lens Style/Size="Rectangle with Flat Top, 1.40mm x 1.25mm", Lens Transparency=Clear, Mounting Type="Surface Mount", Packaging="Cut Tape (CT)", Part Status=Active, Pricing 1="1=0.31, 10=0.225, 25=0.1656, 100=0.1183, 250=0.0804, 500=0.07096, 1000=0.05558 (USD)", RoHS="RoHS Compliant", Size / Dimension="2.00mm L x 1.25mm W", Stock 1=350441, Supplier 1=Digi-Key, Viewing Angle=130°, Wavelength - Dominant=571nm, Wavelength - Peak=574nm
F1 F2 F3: library part "3588 Fuse Holder", "Keystone Electronics 3588", Supplier Part Number 1=36-3588-ND, Datasheet=http://keyelco.com/userAssets/file/M65p43.pdf, Supplier 1=Digi-Key
L1: "Inductor Power Shielded/Molded Wirewound 10uH 20% 100KHz Powdered Iron 4A 78.5mOhm DCR T/R", Package="Nonstandard Bourns", Digi-Key_Part_Number=SRP6540-100MCT-ND, Digi-Key_Purchase_URL=https://www.digikey.com/product-detail/en/bourns-inc/SRP6540-100M/SRP6540-100MCT-ND/3986041?utm_source=snapeda&utm_medium=aggregator&utm_campaign=symbol, MF=Bourns, MP=SRP6540-100M, SnapEDA_Link=https://www.snapeda.com/parts/SRP6540-100M/Bourns/view-part/?ref=snap
L2: library part SRP5030TA, DC Resistance (DCR)="76.2 mOhm Max", Manufacturer="Bourns Inc.", Manufacturer Part Number=SRP5030TA-6R8M, Operating Temperature="-40°C ~ 150°C", Package / Case=Nonstandard, Q @ Freq="15 @ 100kHz", Ratings=AEC-Q200, Supplier Device Package=-, Supplier Part Number 1=SRP5030TA-6R8MCT-ND, Tolerance=±20%, Category="Inductors, Coils, Chokes", ComponentLink1Description=http://www.bourns.com/docs/Product-Datasheets/SRP5030TA.pdf, ComponentLink1URL=http://www.bourns.com/docs/Product-Datasheets/SRP5030TA.pdf, Height - Seated (Max)="0.118\" (3.00mm)", Material - Core="Carbonyl Powder", Mounting Type="Surface Mount", Packaging="Cut Tape (CT)", Part Status=Active, Pricing 1="1=1.51, 10=1.397, 100=0.9781, 500=0.79178, 1000=0.72191 (USD)", RoHS="RoHS Compliant", Shielding=Shielded, Size / Dimension="0.224\" L x 0.205\" W (5.70mm x 5.20mm)", Stock 1=5626, Supplier 1=Digi-Key, Type=Wirewound
L3: library part CMP-0226-00110-1, "SMD High Current Cube Inductor WE-HCC, L=2.20 µH", Inductance="2.20 µH", ComponentLink1Description="Manufacturer Link", ComponentLink1URL=http://www.we-online.com, ComponentLink2Description=Datasheet, ComponentLink2URL=http://www.we-online.de/katalog/media/pdf/7443330220.pdf, DatasheetVersion="ver 2, Nov-2009", PackageDescription="Inductor, 2-Leads, Body 10.9 x 10.0 mm", PackageReference=WE-HCC-1090, PackageVersion=2009
MH1 MH2 MH3 MH4: library part "Mounting Hole #4-40, Loose Fit", "Mounting Hole for ANSI #4-40 w/ Flat Washer, Loose Fit", Datasheet=http://blogs.mentor.com/tom-hausherr/blog/tag/pcb-mounting-holes/
NT1: "Use to tie together nets"
P2: library part "8-Pin 2-Row Nano-Fit", "NanoFit RA Hdr TH DR 8Ckt", Manufacturer=Molex, Part Number=105314-1216, Supplier Part Number=WM15165-ND, Supplier Part Number 1=WM15168-ND, Supplier=Digi-Key, Supplier 1=Digi-Key
P3: Supplier Part Number 1=WM14972-ND, RefDes=RefDes, Supplier 1=Digi-Key, Type=Type
R1 R2: library part WSLP59312L000FEA
R3: library part CMP-1012-00768-1, "200K 0.1W 1% 0603 (1608 Metric)  SMD", Case-EIA=0603, Case-Metric=1608, Power="0.1 W", Tolerance="1 %", Technology=SMT
R4 R5: "Resistor", LatestRevisionDate=29-May-2009, LatestRevisionNote="IPC-7351 Footprint Added.", PackageDescription="Chip Resistor", PackageReference=J1-0603, Published=8-Jun-2000, Publisher="Altium Limited"
R6: library part CMP-1012-00660-1, "22K1 0.1W 1% 0603 (1608 Metric)  SMD", Case-EIA=0603, Case-Metric=1608, Power="0.1 W", Tolerance="1 %", Technology=SMT
R7: library part CMP-1012-00533-1, "1K65 0.1W 1% 0603 (1608 Metric)  SMD", Case-EIA=0603, Case-Metric=1608, Power="0.1 W", Tolerance="1 %", Technology=SMT
R8: library part CMP-1012-00821-1, "560K 0.1W 1% 0603 (1608 Metric)  SMD", Case-EIA=0603, Case-Metric=1608, Power="0.1 W", Tolerance="1 %", Technology=SMT
R9: library part CMP-1012-00509-1, "976R 0.1W 1% 0603 (1608 Metric)  SMD", Case-EIA=0603, Case-Metric=1608, Power="0.1 W", Tolerance="1 %", Technology=SMT
R10: library part CMP-1012-00719-1, "69K8 0.1W 1% 0603 (1608 Metric)  SMD", Case-EIA=0603, Case-Metric=1608, Power="0.1 W", Tolerance="1 %", Technology=SMT
R11: library part CMP-1012-00729-1, "86K6 0.1W 1% 0603 (1608 Metric)  SMD", Case-EIA=0603, Case-Metric=1608, Power="0.1 W", Tolerance="1 %", Technology=SMT
R12: library part CMP-1012-00758-1, "162K 0.1W 1% 0603 (1608 Metric)  SMD", Case-EIA=0603, Case-Metric=1608, Power="0.1 W", Tolerance="1 %", Technology=SMT
R13: library part CMP-1012-00623-1, "10K 0.1W 1% 0603 (1608 Metric)  SMD", Case-EIA=0603, Case-Metric=1608, Power="0.1 W", Tolerance="1 %", Technology=SMT
R14 R15: library part CMP-1012-00738-1, "105K 0.1W 1% 0603 (1608 Metric)  SMD", Case-EIA=0603, Case-Metric=1608, Power="0.1 W", Tolerance="1 %", Technology=SMT
R16: library part "TT 22AR Trim Pot", "TT Electronics BI 22AR100KLFTR SMT trim pot, 100k 20%", Supplier Part Number 1=987-1003-1-ND, Tolerance=20%, Datasheet=http://www.bitechnologies.com/pdfs/22.pdf, Supplier 1=Digi-Key
R17: library part CMP-1012-00510-1, "1K 0.1W 1% 0603 (1608 Metric)  SMD", Case-EIA=0603, Case-Metric=1608, Power="0.1 W", Tolerance="1 %", Technology=SMT
R18: library part CMP-1012-00454-1, "330R 0.1W 1% 0603 (1608 Metric)  SMD", Case-EIA=0603, Case-Metric=1608, Power="0.1 W", Tolerance="1 %", Technology=SMT
R19 R20: library part CMP-1012-00586-1, "4K7 0.1W 1% 0603 (1608 Metric)  SMD", Case-EIA=0603, Case-Metric=1608, Power="0.1 W", Tolerance="1 %", Technology=SMT
R21 R22 R24 R25 R31 R34: library part CMP-1012-00397-1, "100R 0.1W 1% 0603 (1608 Metric)  SMD", Case-EIA=0603, Case-Metric=1608, Power="0.1 W", Tolerance="1 %", Technology=SMT
R23: library part CMP-1012-00787-1, "294K 0.1W 1% 0603 (1608 Metric)  SMD", Case-EIA=0603, Case-Metric=1608, Power="0.1 W", Tolerance="1 %", Technology=SMT
R26: library part CMP-1012-00646-1, "16K5 0.1W 1% 0603 (1608 Metric)  SMD", Case-EIA=0603, Case-Metric=1608, Power="0.1 W", Tolerance="1 %", Technology=SMT
R27 R28 R29 R30 R32 R33 R35 R36 R41: library part CMP-1012-00050-1, "100R 0.1W 5% 0603 (1608 Metric)  SMD", Case-EIA=0603, Case-Metric=1608, Power="0.1 W", Tolerance="5 %", Technology=SMT
R37 R38: library part CMP-1012-00518-1, "1K2 0.1W 1% 0603 (1608 Metric)  SMD", Case-EIA=0603, Case-Metric=1608, Power="0.1 W", Tolerance="1 %", Technology=SMT
R39: library part CMP-1012-00473-1, "470R 0.1W 1% 0603 (1608 Metric)  SMD", Case-EIA=0603, Case-Metric=1608, Power="0.1 W", Tolerance="1 %", Technology=SMT
R40: library part CMP-1012-00058-1, "220R 0.1W 5% 0603 (1608 Metric)  SMD", Case-EIA=0603, Case-Metric=1608, Power="0.1 W", Tolerance="5 %", Technology=SMT
RT1: library part CMP-2000-05271-1, "NTC Thermistor, 10 KOhm, +/- 1%, 0.1 W, -40 to 125 degC, 0603 (1608 Metric), RoHS, Tape and Reel", Manufacturer=Murata, Rated Current=310A, Resistance=10kO, Temperature Range=-40to+125degC, Tolerance (%)=±1%, B-constant=3434K, Datasheet URL=http://www.jameco.com/Jameco/Products/ProdDS/1870999.pdf, Datasheet Version=Apr-05, Manufacturer URL=http://www.murata.com/, Type=NTC
TP1 TP2 TP3 TP4 TP5 TP6 TP7 TP8 TP9: "Keyston Electronics 5001 Test Point Loop", Color=Black, Manufacturer="Keystone Electronics", Manufacturer P/N=5001, Supplier Part Number 1=36-5001-ND, Supplier 1=Digi-Key
U1 U2: Current - Output=3A, Frequency - Switching=400kHz, Manufacturer="Texas Instruments", Manufacturer Part Number=LMR23630AFQDDARQ1, Operating Temperature="-40°C ~ 125°C (TJ)", Package / Case="8-SOIC (0.154\", 3.90mm Width) Exposed Pad", Supplier Device Package="8-SO PowerPad", Supplier Part Number 1=296-45260-6-ND, Voltage - Input (Max)=36V, Voltage - Input (Min)=4.5V, Voltage - Output (Max)=28V, Voltage - Output (Min/Fixed)=1V, Category="Integrated Circuits (ICs)", ComponentLink1Description=http://www.ti.com/lit/ds/symlink/lmr23630-q1.pdf, ComponentLink1URL=http://www.ti.com/lit/ds/symlink/lmr23630-q1.pdf, Function=Step-Down, Mounting Type="Surface Mount", Number of Outputs=1, Output Configuration=Positive, Output Type=Adjustable, Packaging=Digi-Reel®, Part Status=Active, Pricing 1="1=3.97, 10=3.564, 100=2.9204, 500=2.48604, 1000=2.09667 (USD)", RoHS="RoHS Compliant", Stock 1=1636, Supplier 1=Digi-Key, Synchronous Rectifier=Yes, Topology=Buck
U3: library part TPS53319DQPT, "No Description Available", Built_By=EMA_UL_Team, Copyright="Copyright (C) 2018 Accelerated Designs. All rights reserved", Manufacturer_Part_Number=TPS53319DQPT, RefDes=RefDes, Type=DEV, Vendor="Texas Instruments"
U4 U5: library part CSD18563Q5A, "No Description Available", Built_By=EMA_UL_Team, Copyright="Copyright (C) 2018 Accelerated Designs. All rights reserved", Manufacturer_Part_Number=CSD18563Q5A, RefDes=RefDes, Type=DEV, Vendor="Texas Instruments"
U6: library part CMP-1558-00003-1, "High-Speed High-Side MOSFET Driver, 12 to 36 V, -40 to 85 degC, 8-Pin SOIC, RoHS, Tube", Temperature Max="85 degC", Temperature Min="-40 degC", ComponentLink1Description="Manufacturer URL", ComponentLink1URL=http://www.micrel.com/, ComponentLink2Description=Datasheet, ComponentLink2URL=http://www.micrel.com/_PDF/mic5021.pdf, ComponentLink3Description="Package Specification", ComponentLink3URL=http://www.micrel.com/_Packages/SOICN-8LD-PL-1.pdf, Mounting Technology="Surface Mount", PackageDescription="8-Pin Small Outline Integrated Package, Body 4.89 x 3.90 mm, Pitch 1.27 mm", PackageVersion="Rev. A", Packing=Tube, PartNumber=MIC5021YM, RoHS=TRUE, VDD Max="36 V", VDD Min="12 V"
U7: "No Description Available", Built_By=EMA_UL_Team, Copyright="Copyright (C) 2018 Accelerated Designs. All rights reserved", Manufacturer_Part_Number=BQ34Z100PWR-G1, RefDes=RefDes, Type=DEV, Vendor="Texas Instruments"
U8: library part CMP-0780-00173-1, "8-Bit Parallel-Out Serial Shift Registers, PW0014A, TUBE", F @ Nom Voltage(Max)(Mhz)=28, ICC @ Nom Voltage(Max)(mA)=0.08, Operating Temperature Range(C)="-40 to 125", Part Number=SN74HC164, Rating=Catalog, tpd @ Nom Voltage(Max)(ns)=38, Voltage(Nom)(V)=6, 3-State Output=No, Bits=4, Code_IPC=MO-153, Code_JEITA=1.2, ComponentLink1Description="Manufacturer URL", ComponentLink1URL=http://www.ti.com/, ComponentLink2Description=Datasheet, ComponentLink2URL=http://www.ti.com/lit/ds/symlink/sn74hc164.pdf, DatasheetVersion=SCLS115F, Input Type=CMOS, Output Drive (IOL/IOH)(Max)(mA)=5.2/-5.2, Output Type=CMOS, PackageReference=PW0014A, PackageVersion=http://www.ti.com/lit/ml/mpds360/mpds360.pdf, PartNumber=SN74HC164PW, Technology Family=HC, VCC(Max)(V)=6, VCC(Min)(V)=2

## Via types
v1: diameter 30, hole 15, Component Side to Solder Side, 173 vias
v2: diameter 20, hole 10, Component Side to Solder Side, tented top, 12 vias

## Nets (pads, with @x,y where several pads share a name; then routed paths per layer and width w, separated by ;. In a path a pad name is that pad's centre, name@x,y a point inside that pad or via, vN(x,y) a via of type N, cw(c..) or ccw(c..) an arc to the next point about the centre after c; other vN are vias at no path point)
GND: C3.1 C4.1 C5.1 C6.1 C9.1 C10.1 C11.1 C12.1 C13.1 C14.1 C16.1 C18.1 C19.1 C20.1 C22.1 C24.2 C25.1 C26.1 C27.2 C29.2 C30.1 D2.2 D3.3 D12.1 D13.1 D14.1 D15.1 D16.1 J1.1 J2.1 J3.1 J4.1 J5.1 J6.1 J7.1 J8.1 MH1.0 MH2.0 MH3.0 MH4.0 NT1.1 P2.2 P2.7 P3.2 R1.2 R2.2 R5.1 R6.1 R11.1 R12.1 R13.1 R14.1 R26.1 TP1.1 TP3.1 U1.6 U1.8 U1.9 U2.6 U2.8 U2.9 U3.23 U6.4 U7.8 U8.7 | length 950.5
  Component Side w10: C26.1 C25.1 3007.44,2431.85 R26.1 ; C27.2 C29.2 3626.22,2331.22 v1(3600,2305) ; D3.3 3623.47,2528 v1(3625,2529.53) ; v1(4572.22,2510) C30.1
  Component Side w17: v1(4433.86,2261.14) U8.7
  Component Side w30: MH2.0 5051.26,1301.26 D13.1 D16.1 D15.1 D14.1
  other v1: 1110,2334.88 1155,2335 1200,2335 1295,2334.76 1340,2334.88 1385,2334.88 1520,2335 1565,2335.12 1610,2335.12 1705,2334.88 1750,2335 1795,2335 1110,2374.88 1155,2375 1200,2375 1295,2374.88 1340,2375 1385,2375 1520,2375 1565,2375.12 1610,2375.12 1705,2375 1750,2375.12 1795,2375.12 1110,2419.88 1155,2420 1200,2420 1295,2419.76 1340,2419.88 1385,2419.88 1520,2420 1565,2420.12 1610,2420.12 1705,2419.88 1750,2420 1795,2420 1110,2460 1155,2460.12 1200,2460.12 1295,2459.88 1340,2460 1385,2460 1520,2460.12 1565,2460.24 1610,2460.24 1705,2460 1750,2460.12 1795,2460.12
  other v2: 3347.76,2989.41 3395,2989.41 3438.31,2989.41 2622.76,3034.41 2670,3034.41 2713.31,3034.41 3347.76,3040.59 3395,3040.59 3438.31,3040.59 2622.76,3085.59 2670,3085.59 2713.31,3085.59
NetC1_1: C1.1 L1.1 U1.1
NetC1_2: C1.2 U1.2
NetC2_1: C2.1 L2.1 U2.1
NetC2_2: C2.2 U2.2
NetC7_1: C7.1 R3.1 R6.2 U1.4
NetC7_2: C7.2 C9.2 C11.2 F1.1 L1.2 R3.2
NetC8_1: C8.1 R4.1 R5.2 U2.4
NetC8_2: C8.2 C10.2 C12.2 F2.1 L2.2 R4.2
NetC13_2: C13.2 U1.3
NetC14_2: C14.2 U2.3
NetC15_1: C15.1 C16.2 F3.1 L3.2 R10.2
NetC15_2: C15.2 C21.2 R7.2
NetC17_1: C17.1 L3.1 R7.1 U3.6 U3.7 U3.8 U3.9 U3.10 U3.11
NetC17_2: C17.2 U3.4
NetC21_1: C21.1 R10.1 R13.2 U3.1
NetC22_2: C22.2 R15.1 U3.18
NetC23_1: C23.1 U6.8 | length 71.4
  Component Side w10: U6.8 2544.29,2342.44 C23.1
NetD3_1: D3.1 R24.2 R25.1 | length 245.2
  Component Side w10: R24.2 3535,2520 3564.4,2490.6 D3.1 3685.49,2490.6 3717.31,2458.78 R25.1
NetD3_2: D3.2 R21.2 R22.1 | length 259.4
  Component Side w10: R21.2 3659.77,2570 D3.2 3694.6,2565.4 3705,2555 3705,2527.31 3717.31,2515 3741.22,2515 R22.1
NetD4_1: D4.1 R27.2 | length 71.2
  Component Side w10: R27.2 D4.1
NetD5_1: D5.1 R28.2 | length 71.2
  Component Side w10: R28.2 D5.1
NetD6_1: D6.1 R29.2 | length 71.6
  Component Side w10: R29.2 4931.5,2175 D6.1
NetD7_1: D7.1 R30.2 | length 71.2
  Component Side w10: R30.2 D7.1
NetD8_1: D8.1 R32.2 | length 71.2
  Component Side w10: R32.2 D8.1
NetD9_1: D9.1 R33.2 | length 71.2
  Component Side w10: R33.2 D9.1
NetD10_1: D10.1 R35.2 | length 71.2
  Component Side w10: R35.2 D10.1
NetD11_1: D11.1 R36.2 | length 71.2
  Component Side w10: R36.2 D11.1
NetD12_2: D12.2 R37.1
NetD13_2: D13.2 R38.1 | length 70.2
  Component Side w10: R38.1 4931.18,1362.44 D13.2
NetD14_2: D14.2 R39.1 | length 70.2
  Component Side w10: R39.1 4931.18,1722.44 D14.2
NetD15_2: D15.2 R40.1 | length 72.2
  Component Side w10: R40.1 4926.18,1607.44 D15.2
NetD16_2: D16.2 R41.1 | length 70.2
  Component Side w10: R41.1 4931.18,1487.44 D16.2
NetP2_3: P2.3 U6.2
NetP2_4: P2.4 R19.1 R22.2 TP6.1 | length 991.4
  Component Side w10: R19.1 R22.2 3873.78,2513.78 TP6.1 3997,2443 4277.54,2443 4417.95,2583.4 4506.27,2583.4 4592.87,2670 P2.4
NetP2_8: P2.8 R20.1 R25.2 TP8.1 | length 1081.2
  Component Side w10: R20.1 R25.2 3866.22,2458.78 TP8.1 4285,2425 4425.4,2565.4 4615,2565.4 4692.32,2642.72 P2.8
NetR8_1: R8.1 R9.1 R11.2
NetR9_2: R9.2 U3.2
NetR12_2: R12.2 U3.21
NetR14_2: R14.2 U3.20
NetR15_2: R15.2 U3.3
NetR16_2: R16.2 R17.2 | length 136.6
  Component Side w10: R17.2 2815,2585 R16.2
NetR17_1: R17.1 U6.5 | length 172.6
  Component Side w10: U6.5 2615,2520 2635,2540 2635,2582.56 R17.1
NetR18_1: R18.1 U6.6 | length 216.3
  Component Side w10: U6.6 2471.67,2470 2455,2486.67 2455,2562.56 2477.44,2585 R18.1
NetR21_1: R21.1 U7.14 | length 130.1
  Component Side w10: U7.14 3417.27,2517.27 3425,2525 3425,2555.4 3439.6,2570 R21.1
NetR23_1: R23.1 R26.2 U7.4 | length 174.6
  Component Side w10: R26.2 3083.03,2489.53 3105,2467.56 3105,2451.77 3116.27,2440.5 U7.4
NetR24_1: R24.1 U7.13 | length 102.2
  Component Side w10: U7.13 3419.99,2491.68 3448.31,2520 R24.1
NetR27_1: R27.1 U8.3 | length 801.3
  Component Side w10: U8.3 4394.22,2400.59 4321,2327.37 4321,2231.87 4507.87,2045 R27.1
NetR28_1: R28.1 U8.4 | length 719
  Component Side w10: U8.4 4394.09,2375 4339,2319.91 4339,2239.32 4468.32,2110 R28.1
NetR29_1: R29.1 U8.5 | length 636.8
  Component Side w10: U8.5 4393.95,2349.41 4357,2312.46 4357,2246.78 4428.78,2175 R29.1
NetR30_1: R30.1 U8.6 | length 581.4
  Component Side w10: U8.6 4393.82,2323.82 4375,2305 4375,2254.23 4424.23,2205 4640,2205 4670,2235 R30.1
NetR32_1: R32.1 U8.10 | length 162.6
  Component Side w10: U8.10 4718.82,2349.41 4770,2298.23 4802.95,2298.23 R32.1
NetR33_1: R33.1 U8.11 | length 146.3
  Component Side w10: U8.11 4755,2375 4770,2360 R33.1
NetR35_1: R35.1 U8.12 | length 148.1
  Component Side w10: U8.12 4715.83,2400.59 4735.24,2420 R35.1
NetR36_1: R36.1 U8.13 | length 164.4
  Component Side w10: U8.13 4715,2426.18 4773.82,2485 R36.1
NetRT1_2: RT1.2 U7.11 | length 102
  Component Side w10: U7.11 3416.72,2440.5 3442.31,2466.09 RT1.2
P1: U7.3 U8.1 U8.2 | length 1441.5
  Component Side w10: U7.3 3218.53,2466.09 v1(3220,2467.56) ; v1(4378.02,2451.77) U8.1 U8.2
  Solder Side w10: v1(3220,2467.56) 3248,2495.56 3289.44,2495.56 3358.17,2426.83 3823.63,2426.83 3847,2403.46 3847,2403.05 3878.05,2372 3878.46,2372 3910.46,2340 4290,2340 4378.02,2428.02 v1(4378.02,2451.77)
P2: U7.1 U8.8 | length 1641.9
  Component Side w10: U7.1 3227.73,2517.27 v1(3277.44,2467.56) ; v1(4666.14,2270.12) U8.8
  Solder Side w10: v1(3277.44,2467.56) 3336.17,2408.83 3816.17,2408.83 3829,2396 3829,2395.59 3904.59,2320 4616.26,2320 v1(4666.14,2270.12)
REG25: C26.2 RT1.1 U7.7 | length 104.3
  Component Side w10: C26.2 3077.98,2335 3106.71,2363.73 U7.7
RSENSE+: NT1.2 R16.3 R31.1 | length 120.6
  Component Side w10: R16.3 2989.53,2529.53 3000,2540 v1(3000,2555) ; v1(3526.22,2305) R31.1
RSENSE-: P1.1 R1.1 R2.1 R16.1 R18.2 R34.1 | length 521.8
  Component Side w10: R18.2 2572.56,2612.56 2585,2625 2934.65,2625 R16.1 2989.53,2620.47 3000,2610 v1(3000,2595) ; v1(3676.22,2305) R34.1
  other v1: 1110,2769.76 1155,2769.88 1200,2769.88 1295,2769.65 1340,2769.76 1385,2769.76 1520,2769.88 1565,2770 1610,2770 1705,2769.76 1750,2769.88 1795,2769.88 1110,2809.76 1155,2809.88 1200,2809.88 1295,2809.76 1340,2809.88 1385,2809.88 1520,2809.88 1565,2810 1610,2810 1705,2809.88 1750,2810 1795,2810 1110,2854.76 1155,2854.88 1200,2854.88 1295,2854.65 1340,2854.76 1385,2854.76 1520,2854.88 1565,2855 1610,2855 1705,2854.76 1750,2854.88 1795,2854.88 1110,2894.88 1155,2895 1200,2895 1295,2894.76 1340,2894.88 1385,2894.88 1520,2895 1565,2895.12 1610,2895.12 1705,2894.88 1750,2895 1795,2895
SRN: C28.1 C29.1 R34.2 U7.10 | length 331.6
  Component Side w10: U7.10 3467.65,2414.91 C28.1 3491.85,2434.41 3606.72,2434.41 3626.22,2414.91 C29.1 R34.2
SRP: C27.1 C28.2 R31.2 U7.9 | length 230.3
  Component Side w10: U7.9 3415.68,2389.32 3447.56,2357.44 C28.2 3483.07,2357.44 R31.2 C27.1
THRUSTERS_GATE: U4.4 U5.4 U6.7 | length 595.4
  Component Side w10: U4.4 2125,2311.37 v1(2129.1,2311.37) ; v1(2371.27,2310.7) 2371.27,2341.05 U5.4 2407.32,2342.32 2485,2420 U6.7
  Solder Side w10: v1(2129.1,2311.37) 2129.1,2350.82 2158.87,2380.59 2346.48,2380.59 2371.27,2355.79 v1(2371.27,2310.7)
VBAT: C24.1 C25.2 D1.1 D2.1 P1.2 R23.2 U4.5 U4.6 U4.7 U4.8 U5.5 U5.6 U5.7 U5.8 U6.1 U7.5 U7.6 | length 746.7
  Component Side w10: v1(2655,2370) U6.1 2753.39,2349.88 C24.1 ; R23.2 R23.2@3062.56,2431.85 ; U7.6 3064.91,2389.32 C25.2 R23.2@3062.56,2431.85 ; U7.5 3110.09,2414.91 3095,2430 3064.41,2430 R23.2@3062.56,2431.85
  Solder Side w10: 2396.69,2415 2441.69,2370 v1(2655,2370)
  other v1: 1980,2408.83 2025,2408.95 2070,2408.95 2115,2408.83 2225,2419.88 2270,2420 2315,2420 2360,2419.88 1980,2448.83 2025,2448.95 2070,2448.95 2115,2448.83 2225,2454.88 2270,2455 2315,2455 2360,2454.88 1980,2493.83 2025,2493.95 2070,2493.95 2115,2493.83 2225,2494.88 2270,2495 2315,2495 2360,2494.88 1980,2533.95 2025,2534.06 2070,2534.06 2115,2533.95 2225,2535 2270,2535.12 2315,2535.12 2360,2535
VBAT_THRUSTERS: C23.2 J1.2 J2.2 J3.2 J4.2 J5.2 J6.2 J7.2 J8.2 U4.1 U4.2 U4.3 U5.1 U5.2 U5.3 | length 53.3
  Component Side w10: C23.2 2489.17,2257.82 2490,2256.99
  other v1: 1936.43,2234.21 1981.43,2234.33 2026.43,2234.33 2071.43,2234.21 2181.43,2235.26 2226.43,2235.38 2271.43,2235.38 2316.43,2235.26 1936.43,2270 1981.43,2270.12 2026.43,2270.12 2071.43,2270 2181.43,2271.05 2226.43,2271.17 2271.43,2271.17 2316.43,2271.05 1933.6,2310 1978.6,2310.12 2023.6,2310.12 2068.6,2310 2185,2310 2225,2310.7 2268.6,2311.17 2313.6,2311.05
VCC_3V3: C30.2 D4.2 D5.2 D6.2 D7.2 D8.2 D9.2 D10.2 D11.2 F2.2 P2.6 R19.2 R20.2 R41.2 TP9.1 U8.9 U8.14 | length 914.4
  Component Side w10: R20.2 3742.44,2357.64 v1(3742.64,2357.44) ; R19.2 3742.44,2599.8 v1(3742.64,2600) ; U8.9 4701.18,2323.82 v1(4735,2290) ; U8.14 C30.2@4666.14,2508.44 ; TP9.1 4847.56,1542.56 R41.2
  Component Side w17: C30.2 C30.2@4666.14,2508.44 ; U8.14 4696.77,2451.77 v1(4720,2475)
  Component Side w30: v1(5025,1995) D4.2 D5.2 D6.2 D7.2 D8.2 D9.2 D10.2 D11.2 v1(5025,2530)
VCC_5V: F3.2 P2.5 R40.2 TP7.1 | length 91.4
  Component Side w10: TP7.1 4847.56,1662.56 R40.2
VCC_10V: F1.2 P3.1 R39.2 TP5.1 | length 91.4
  Component Side w10: TP5.1 4847.56,1777.56 R39.2
VCC_BATT_FILT: C3.2 C4.2 C5.2 C6.2 C18.2 C19.2 C20.2 D1.2 R8.2 R37.2 TP2.1 U1.5 U1.7 U2.5 U2.7 U3.12 U3.13 U3.14 U3.15 U3.16 U3.17 U3.19
VCC_THRUSTERS: P2.1 R38.2 TP4.1
pads on no net: J1. J2. J3. J4. J5. J6. J7. J8. P2. P3. U3.5 U3.22 U3.V U6.3 U7.2 U7.12

## Polygon pours and split planes (outlines as drawn)
GND on Component Side (solid, pour order 2): 1870,2475 1870,2255 cw(c1685,2255) 1685,2070 1622.62,2070 ccw(c1622.62,1907.38) 1460,1907.38 1460,1807.91 ccw(c1552.91,1807.91) 1552.91,1715 4650,1715 cw(c4650,1665) 4700,1665 4700,1030 1030,1030 1030,2475 cw(c1070,2475) 1070,2515 1830,2515 cw(c1830,2475)
GND on Solder Side (solid, pour order 4): 1870,2475 1870,2255 cw(c1685.29,2255) 1685.29,2070.29 1621.38,2070.29 ccw(c1621.38,1908.9) 1460,1908.9 1460,1806 ccw(c1550.72,1806) 1550.72,1715.29 4649.71,1715.29 cw(c4649.71,1665) 4700,1665 4700,1030.29 1030,1030.29 1030,2475 cw(c1070,2475) 1070,2515 1830,2515 cw(c1830,2475)
VCC_3V3 on Power Plane (split plane): 5139.9,1020.1 1020.1,1020.1 1020.1,3854.9 5139.9,3854.9
GND on Ground Plane (split plane): 5139.9,1020.1 1020.1,1020.1 1020.1,3854.9 5139.9,3854.9

## Other copper
Component Side: